# EAGLE board buttons template (EAGLE 7.1.0)

Size 116 x 71 mm. Coordinates in mm from the lower left corner, seen from the top.
Outline: 29,0 0,0 0,36
Outline: 29,0 116,0 116,36
Outline: 116,36 116,38.5
Outline: 116,38.5 116,71 29,71
Outline: 0,38.5 0,71 29,71
Outline: 0,38.5 0,36
Outline: 116,36 0,36
Outline: 116,38.5 0,38.5
Outline: 29,0 29,71
Copper layers (1*16): Top 0.035mm / dielectric 1.5mm / Bottom 0.035mm
Design rules "default": minimum track width 10mil, minimum drill 24mil, track to track 8mil, track to pad 8mil, pad to pad 8mil, via to via 8mil, smd to smd 8mil, copper to edge 40mil, drill to drill 8mil, minimum pad ring 10mil, minimum via ring 8mil, stop-mask expansion 4mil, vias tented up to drill 0mil, thermal gap 10mil

## Footprints (pad centres in the part's own frame; a part is rotated, then mirrored left to right if it is on the bottom)
DRILL_0.1560 = hole 3.962: 0,0

## Placement (x,y rotation side)
E$1  [DRILL_0.1560]  20.5,11.6 0 top
E$2  [DRILL_0.1560]  40.5,11.6 0 top
E$3  [DRILL_0.1560]  60.5,11.6 0 top
E$4  [DRILL_0.1560]  80.5,11.6 0 top

## Library data of the parts
E$1-E$4 = special-drill

## Text on the board
tNames: Align this line with the center / of plastic standoff in the box | Use 4mm or 4.5mm drill